# EAGLE board iRob_Upsized_F3DISCO_Shield v26 (EAGLE 9.7.0)
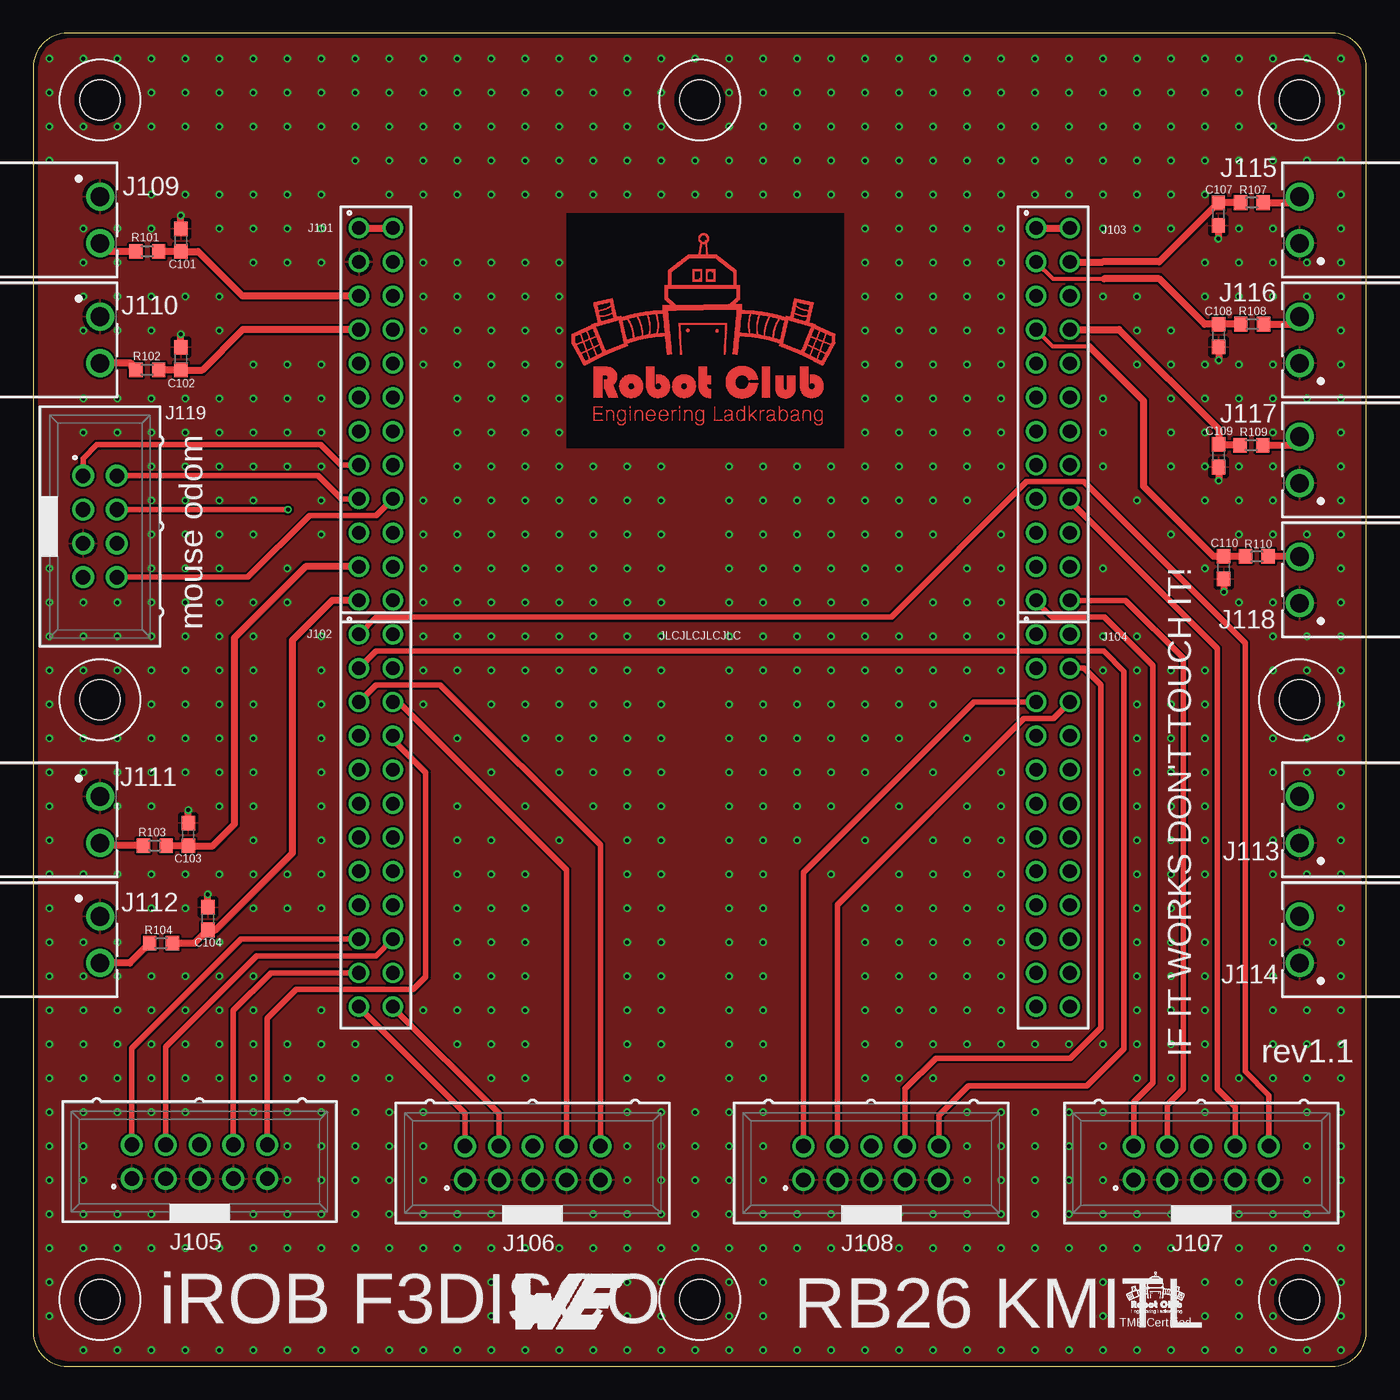
[diagram p0: board, top side]
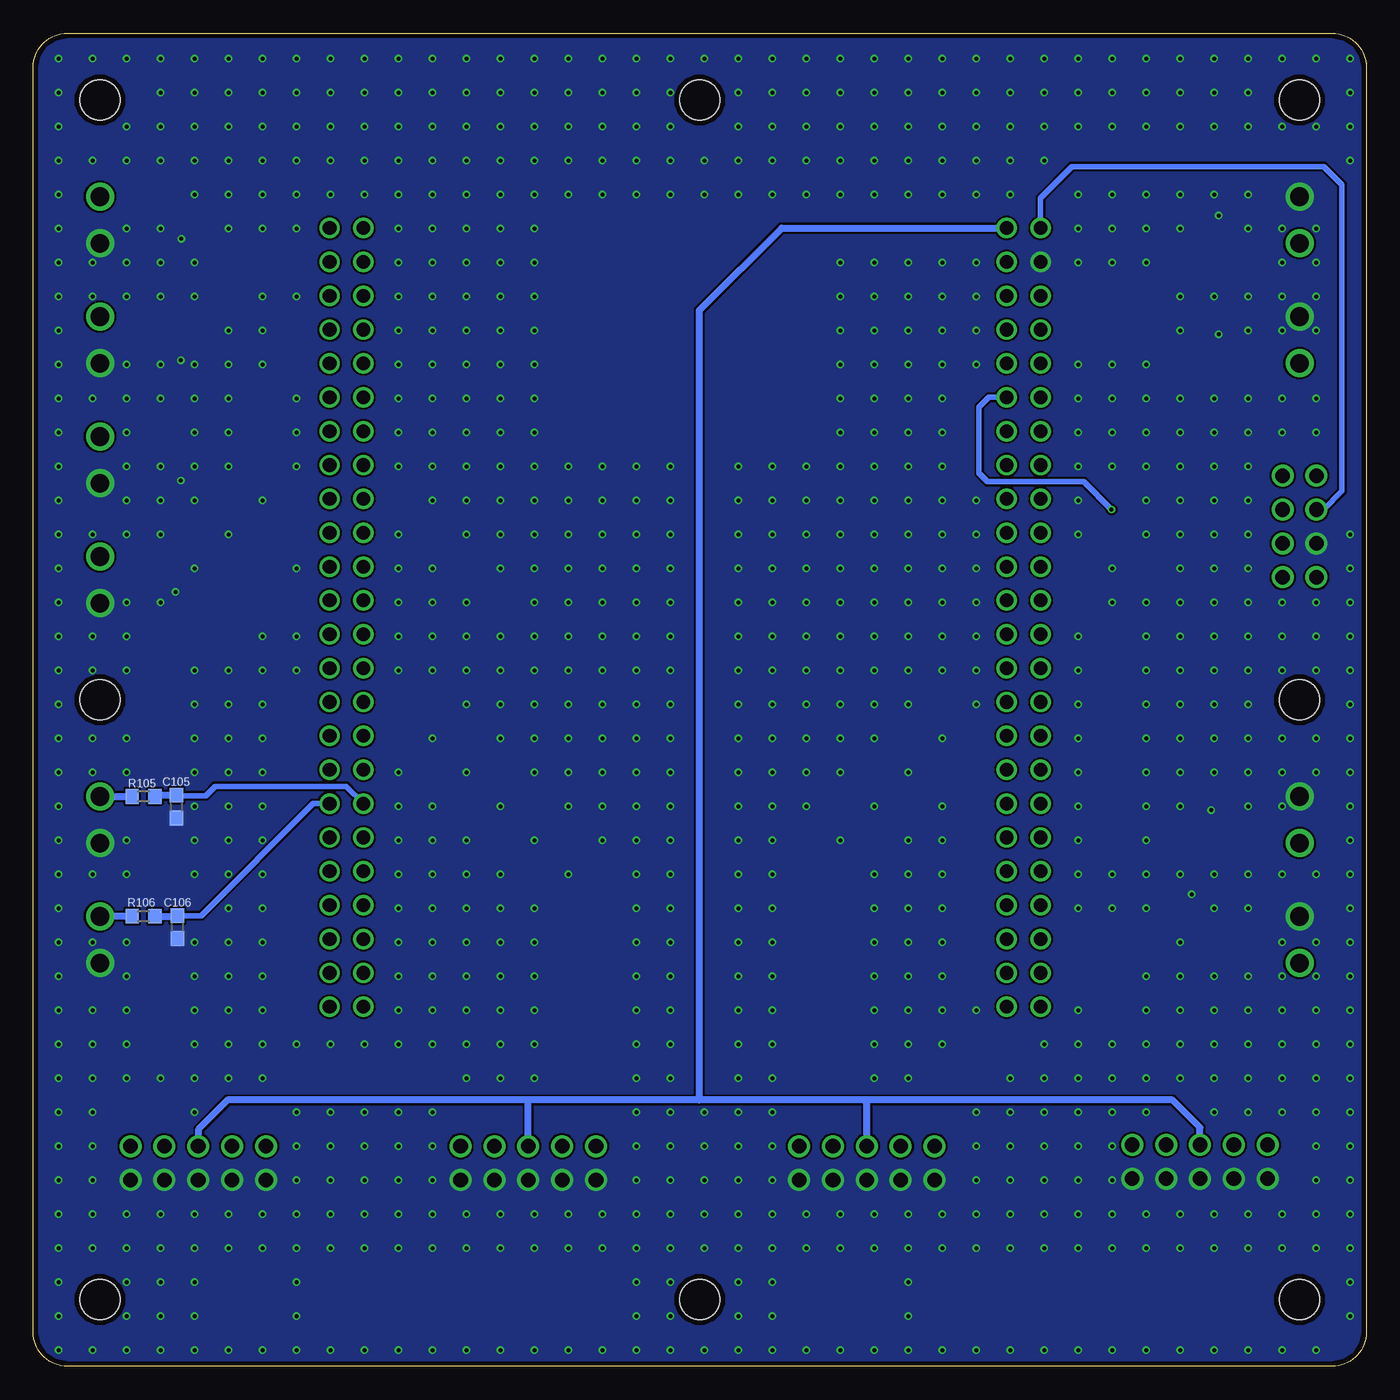
[diagram p1: board, bottom side, seen from below]

Size 100 x 100 mm. Coordinates in mm from the lower left corner, seen from the top.
Outline: 0,97.46 0,2.54 arc90 2.54,0 97.46,0 arc90 100,2.54 100,97.46 arc90 97.46,100 2.54,100 arc90 0,97.46
Copper layers (1*16): Top / Bottom
Stack-up Default Layer Stack: Top User Defined 0.035559375mm / Dielectric-1 User Defined 1.6mm / Bottom User Defined 0.035559375mm
Design rules: minimum copper width 6mil, minimum drill size 10mil, copper clearance wire_polygon to wire_polygon 6mil, copper clearance wire_polygon to pad_smd 6mil, copper clearance wire_polygon to via 6mil, copper clearance pad_smd to pad_smd 6mil, copper clearance pad_smd to via 6mil, copper clearance via to via 6mil, copper clearance smd to pad (same net) 6mil, copper clearance smd to via (same net) 6mil, copper clearance smd to smd (same net) 6mil, dimension clearance 15mil, via restrict clearance 0mil, restrict clearance 0mil, drill distance 6mil, keepout clearance 0mil
Holes 3 mm at 5,95 5,5 95,5 95,95 50,95 50,5 5,50 95,50
RestrictTop: area 40,68.9 to 60.8,86.5
RestrictVias: area 0.8,64.4 to 1.7,65.6; area 18.6,26.1 to 19.6,27.2; area 87.5,62 to 88.2,62.9; area 85.1,64.7 to 85.6,65.2; area 40,69 to 60.9,86.5; area 81,2.7 to 86.9,7.1; area 55.9,2.5 to 77.5,7.3; area 8.7,2.7 to 32.7,7.5; area 35.9,2.2 to 43.9,7.5

## Footprints (pad centres in the part's own frame; a part is rotated, then mirrored left to right if it is on the bottom)
C0603 = smd 1.1 x 1: 1 -0.85,0; 2 0.85,0
61302421821 = drill 1.02: 1 -13.97,-1.27; 2 -13.97,1.27; 3 -11.43,-1.27; 4 -11.43,1.27; 5 -8.89,-1.27; 6 -8.89,1.27; 7 -6.35,-1.27; 8 -6.35,1.27; 9 -3.81,-1.27; 10 -3.81,1.27; 11 -1.27,-1.27; 12 -1.27,1.27; 13 1.27,-1.27; 14 1.27,1.27; 15 3.81,-1.27; 16 3.81,1.27; 17 6.35,-1.27; 18 6.35,1.27; 19 8.89,-1.27; 20 8.89,1.27; 21 11.43,-1.27; 22 11.43,1.27; 23 13.97,-1.27; 24 13.97,1.27
61201021621 = drill 1.1: 1 -5.08,-1.27; 2 -5.08,1.27; 3 -2.54,-1.27; 4 -2.54,1.27; 5 0,-1.27; 6 0,1.27; 7 2.54,-1.27; 8 2.54,1.27; 9 5.08,-1.27; 10 5.08,1.27
691322110002 = drill 1.4: 1 -1.75,0; 2 1.75,0
61200821621 = drill 1.1: 1 -3.81,-1.27; 2 -3.81,1.27; 3 -1.27,-1.27; 4 -1.27,1.27; 5 1.27,-1.27; 6 1.27,1.27; 7 3.81,-1.27; 8 3.81,1.27
R0603 = smd 1 x 1.1: 1 -0.85,0; 2 0.85,0

## Placement (x,y rotation side)
C101  [C0603]  11.07,84.48 90 top
C102  [C0603]  11.07,75.59 90 top
C103  [C0603]  11.63,39.89 90 top
C104  [C0603]  13.1,33.58 90 top
C105  [C0603]  89.27,41.98 270 bottom
C106  [C0603]  89.19,32.95 270 bottom
C107  [C0603]  88.9,86.44 270 top
C108  [C0603]  88.93,77.32 270 top
C109  [C0603]  88.93,68.3 270 top
C110  [C0603]  89.31,59.92 270 top
J101  61302421821  [61302421821]  25.7,71.42 270 top
J102  61302421821  [61302421821]  25.7,40.94 270 top
J103  61302421821  [61302421821]  76.5,71.42 270 top
J104  61302421821  [61302421821]  76.5,40.94 270 top
J105  61201021621  [61201021621]  12.47,15.34 0 top
J106  61201021621  [61201021621]  37.47,15.24 0 top
J107  61201021621  [61201021621]  87.63,15.24 0 top
J108  61201021621  [61201021621]  62.87,15.24 0 top
J109  691322110002  [691322110002]  5,86 270 top
J110  691322110002  [691322110002]  5,77 270 top
J111  691322110002  [691322110002]  5,41 270 top
J112  691322110002  [691322110002]  5,32 270 top
J113  691322110002  [691322110002]  95,41 90 top
J114  691322110002  [691322110002]  95,32 90 top
J115  691322110002  [691322110002]  95,86 90 top
J116  691322110002  [691322110002]  95,77 90 top
J117  691322110002  [691322110002]  95,68 90 top
J118  691322110002  [691322110002]  95,59 90 top
J119  61200821621  [61200821621]  5,63 270 top
R101  [R0603]  8.56,83.64 0 top
R102  [R0603]  8.56,74.75 0 top
R103  [R0603]  9.12,39.05 0 top
R104  [R0603]  9.59,31.74 0 top
R105  [R0603]  91.73,42.75 0 bottom
R106  [R0603]  91.73,33.76 180 bottom
R107  [R0603]  91.41,87.3 0 top
R108  [R0603]  91.44,78.18 0 top
R109  [R0603]  91.39,69.09 0 top
R110  [R0603]  91.8,60.76 0 top

## Library data of the parts
C101-C110 R101-R110 = adafruit
J101-J104 = Wurth_Connectors_WR-PHD; DATASHEET-URL: https://www.we-online.com/catalog/datasheet/61302421821.pdf; GENDER: Socket Header; IR: 3A; MOUNT: THT; PACKAGING: Tray; PART-NUMBER: 61302421821; PINS: 24; PITCH: 2.54mm; ROWS: Dual; TYPE: Straight
J105-J108 = Wurth_Connectors_WR-BHD; CONTACT-RESISTANCE: 20mOhm; DATASHEET-URL: https://www.we-online.com/catalog/datasheet/61201021621.pdf; GENDER: Male; IR: 3A; LENGTH: 20.36mm; MOUNT: THT; PACKAGING: Tray; PART-NUMBER: 61201021621; PINS: 10; PITCH: 2.54mm; TYPE: Straight; WORKING-VOLTAGE: 250V(AC)
J109-J118 = Wurth_Connectors_WR-TBL Pluggable Connector; DATASHEET-URL: https://www.we-online.com/catalog/datasheet/691322110002.pdf; IR-UL: 10A; IR-VDE: 10.5A; MOUNT: THT; PART-NUMBER: 691322110002; PINS: 2; PITCH: 3.5mm; TYPE: Horizontal; WORKING-VOLTAGE-UL: 300V (AC); WORKING-VOLTAGE-VDE: 300V (AC)
J119 = Wurth_Connectors_WR-BHD; CONTACT-RESISTANCE: 20mOhm; DATASHEET-URL: https://www.we-online.com/catalog/datasheet/61200821621.pdf; GENDER: Male; IR: 3A; LENGTH: 17.82mm; MOUNT: THT; PACKAGING: Tray; PART-NUMBER: 61200821621; PINS: 8; PITCH: 2.54mm; TYPE: Straight; WORKING-VOLTAGE: 250V(AC)

## Nets
BOOT0: J103.19
DRDY: J103.13
DRDY/INT2_L3GD20: J103.16
ENC1_A: J103.23 J107.2
ENC1_B: J103.24 J107.4
ENC2_A: J104.5 J108.2
ENC2_B: J104.6 J108.4
ENC3_A: J102.23 J106.2
ENC3_B: J102.24 J106.4
ENC4_A: J102.20 J105.4
ENC4_B: J102.19 J105.2
GND: C101.2 C102.2 C103.2 C104.2 C105.2 C106.2 C107.2 C108.2 C109.2 C110.2 J101.3 J105.1 J105.3 J105.5 J105.7 J105.9 J106.1 J106.3 J106.5 J106.7 J106.9 J107.1 J107.3 J107.5 J107.7 J107.9 J108.1 J108.3 J108.5 J108.7 J108.9 J109.1 J110.1 J111.1 J112.1 J113.1 J114.1 J115.1 J116.1 J117.1 J118.1 J119.5
I2C_SCL: J103.21
I2C_SDA: J103.22
INT1: J103.11
INT1_L3GD20: J103.15
INT2: J103.12
LED_K: J119.7
M1_INB: J103.18 J107.8
M1_PWM: J102.1 J107.10
M2_INB: J104.4 J108.8
M2_PWM: J102.3 J108.10
M3_INB: J102.6 J106.8
M3_PWM: J102.5 J106.10
M4_INB: J102.21 J105.8
M4_PWM: J102.8 J105.10
N$1: J109.2 R101.1
N$4: J110.2 R102.1
N$7: J111.2 R103.1
N$8: J119.6
N$10: J112.2 R104.1
N$13: J113.2 R105.1
N$16: J114.2 R106.2
N$19: J115.2 R107.2
N$21: J116.2 R108.2
N$23: J117.2 R109.2
N$25: J118.2 R110.2
NRST: J101.4
OSC_IN: J103.5
OSC_OUT: J103.6
PB1: C103.1 J101.21 R103.2
PC1: C101.1 J101.5 R101.2
PC3: C102.1 J101.7 R102.2
PC10: C105.1 J104.11 R105.2
PC11: C106.1 J104.12 R106.1
PC14: C110.1 J103.7 R110.1
PC15: C109.1 J103.8 R109.1
PE7: C104.1 J101.23 R104.2
PF9: C108.1 J103.3 R108.1
PF10: C107.1 J103.4 R107.1
ROS_UART_RX: J101.19
ROS_UART_TX: J101.20
SPI1_MISO: J101.18 J119.8
SPI1_MOSI: J101.17 J119.2
SPI1_SCK: J101.15 J119.1
SPI_CS_ADNS5090: J101.12 J119.4
SPI_CS_L3GD20: J103.14
SWCLK: J104.13
SWDIO: J104.16
SWO: J104.2
USB_N: J104.18
USB_P: J104.17
VDD: J103.20
VREG_3V3: J101.1 J101.2 J105.6 J106.6 J107.6 J108.6 J119.3
VUSB_5V: J103.1 J103.2

## Tracks (layer width: path | path; a pad name or v marks a point on that pad's centre or on a via)
ENC1_A
  Top 0.406: J107.2 82.55,19.84 83.98,21.27 83.98,52.58 80.37,56.2 76.4,56.2 75.23,57.37 J103.23
ENC1_B
  Top 0.406: J107.4 85.09,19.61 86.28,20.8 86.28,53.12 81.94,57.45 J103.24
ENC2_A
  Top 0.406: J108.2 57.78,37.03 70.58,49.83 J104.5
ENC2_B
  Top 0.406: J108.4 60.33,34.6 74.3,48.58 76.52,48.58 J104.6
ENC3_A
  Top 0.406: J102.23 24.43,26.93 32.38,18.97 J106.2
ENC3_B
  Top 0.406: J102.24 26.97,26.93 34.92,18.97 J106.4
ENC4_A
  Top 0.406: J102.20 25.72,30.8 16.76,30.8 9.93,23.96 J105.4
ENC4_B
  Top 0.406: J102.19 15.6,32.05 7.39,23.84 J105.2
GND  (via drill 0.3)
  Top 0.508: C101.2 v11.07,86.33 | C102.2 v11.07,77.42 | C103.2 v11.63,41.72 | C104.2 v13.1,35.41 | C107.2 v88.9,84.58 | C110.2 89.33,59.04 v89.33,58.09 | C109.2 v88.92,66.45 | C108.2 v88.92,75.46
  other vias: 67.5,98.1 26.7,98.1 72.6,95.55 31.8,95.55 98.1,93 57.3,93 16.5,93 62.4,90.45 87.9,87.9 47.1,87.9 93,85.35 36.9,82.8 82.8,80.25 67.5,77.7 72.6,75.15 31.8,75.15 98.1,72.6 16.5,72.6 62.4,70.05 21.6,70.05 87.9,67.5 47.1,67.5 98.1,31.8 62.4,29.25 87.9,26.7 47.1,26.7 6.3,26.7 93,24.15 52.2,24.15 11.4,24.15 36.9,21.6 1.2,19.05 26.7,16.5 72.6,13.95 98.1,11.4 57.3,11.4 16.5,11.4 62.4,8.85 21.6,8.85 87.9,6.3 47.1,6.3 93,3.75 36.9,1.2 77.7,1.2 52.2,3.75 31.8,34.35 72.6,34.35 67.5,36.9 1.2,39.45 82.8,39.45 36.9,42 11.4,44.55 52.2,44.55 93,44.55 6.3,47.1 47.1,47.1 87.9,47.1 21.6,49.65 62.4,49.65 16.5,52.2 57.3,52.2 98.1,52.2 31.8,54.75 72.6,54.75 67.5,57.3 1.2,59.85 42,59.85 36.9,62.4 11.4,64.95 52.2,64.95 93,64.95 87.9,98.1 47.1,98.1 6.3,98.1 52.2,95.55 11.4,95.55 77.7,93 36.9,93 82.8,90.45 42,90.45 1.2,90.45 67.5,87.9 26.7,87.9 72.6,85.35 98.1,82.8 16.5,82.8 62.4,80.25 6.3,77.7 93,75.15 36.9,72.6 67.5,67.5 11.4,34.35 36.9,31.8 82.8,29.25 1.2,29.25 67.5,26.7 72.6,24.15 31.8,24.15 98.1,21.6 16.5,21.6 21.6,19.05 47.1,16.5 52.2,13.95 77.7,11.4 36.9,11.4 82.8,8.85 42,8.85 1.2,8.85 16.5,1.2 57.3,1.2 98.1,1.2 52.2,34.35 6.3,36.9 47.1,36.9 87.9,36.9 21.6,39.45 62.4,39.45 16.5,42 57.3,42 98.1,42 72.6,44.55 1.2,49.65 42,49.65 82.8,49.65 36.9,52.2 11.4,54.75 52.2,54.75 93,54.75 6.3,57.3 47.1,57.3 62.4,59.85 16.5,62.4 57.3,62.4 98.1,62.4 31.8,64.95 77.7,98.1 36.9,98.1 82.8,95.55 42,95.55 1.2,95.55 87.9,93 47.1,93 6.3,93 93,90.45 52.2,90.45 98.1,87.9 57.3,87.9 16.5,87.9 62.4,85.35 21.6,85.35 67.5,82.8 72.6,80.25 31.8,80.25 36.9,77.7 82.8,75.15 87.9,72.6 6.3,72.6 93,70.05 11.4,70.05 98.1,67.5 57.3,67.5 1.2,34.35 87.9,31.8 47.1,31.8 6.3,31.8 93,29.25 52.2,29.25 11.4,29.25 98.1,26.7 16.5,26.7 62.4,24.15 21.6,24.15 67.5,21.6 26.7,21.6 72.6,19.05 77.7,16.5 1.2,13.95 87.9,11.4 47.1,11.4 6.3,11.4 93,8.85 52.2,8.85 11.4,8.85 98.1,6.3 26.7,1.2 67.5,1.2 82.8,34.35 36.9,36.9 31.8,39.45 72.6,39.45 21.6,44.55 62.4,44.55 16.5,47.1 57.3,47.1 98.1,47.1 11.4,49.65 52.2,49.65 6.3,52.2 47.1,52.2 87.9,52.2 1.2,54.75 42,54.75 82.8,54.75 36.9,57.3 31.8,59.85 72.6,59.85 67.5,62.4 21.6,64.95 62.4,64.95 16.5,67.5 98.1,98.1 57.3,98.1 16.5,98.1 62.4,95.55 21.6,95.55 67.5,93 26.7,93 72.6,90.45 31.8,90.45 77.7,87.9 36.9,87.9 82.8,85.35 87.9,82.8 6.3,82.8 93,80.25 11.4,80.25 98.1,77.7 62.4,75.15 21.6,75.15 67.5,72.6 72.6,70.05 31.8,70.05 36.9,67.5 67.5,31.8 72.6,29.25 31.8,29.25 36.9,26.7 82.8,24.15 1.2,24.15 87.9,21.6 47.1,21.6 6.3,21.6 52.2,19.05 11.4,19.05 98.1,16.5 21.6,13.95 67.5,11.4 26.7,11.4 72.6,8.85 31.8,8.85 6.3,1.2 47.1,1.2 87.9,1.2 1.2,3.75 21.6,34.35 62.4,34.35 16.5,36.9 98.1,36.9 52.2,39.45 93,39.45 6.3,42 47.1,42 87.9,42 1.2,44.55 42,44.55 82.8,44.55 36.9,47.1 67.5,52.2 21.6,54.75 62.4,54.75 16.5,57.3 57.3,57.3 98.1,57.3 11.4,59.85 52.2,59.85 47.1,62.4 42,64.95 82.8,64.95 85.35,98.1 44.55,98.1 3.75,98.1 90.45,95.55 8.85,95.55 75.15,93 34.35,93 80.25,90.45 39.45,90.45 64.95,87.9 70.05,85.35 95.55,82.8 85.35,77.7 3.75,77.7 90.45,75.15 34.35,72.6 80.25,70.05 39.45,70.05 64.95,67.5 8.85,34.35 34.35,31.8 64.95,26.7 70.05,24.15 95.55,21.6 54.75,21.6 13.95,21.6 19.05,19.05 44.55,16.5 3.75,16.5 49.65,13.95 75.15,11.4 34.35,11.4 80.25,8.85 39.45,8.85 13.95,1.2 54.75,1.2 95.55,1.2 3.75,36.9 44.55,36.9 85.35,36.9 13.95,42 54.75,42 64.95,47.1 39.45,49.65 34.35,52.2 8.85,54.75 3.75,57.3 44.55,57.3 19.05,59.85 59.85,59.85 13.95,62.4 54.75,62.4 95.55,62.4 29.25,64.95 70.05,64.95 64.95,98.1 24.15,98.1 70.05,95.55 29.25,95.55 54.75,93 13.95,93 59.85,90.45 85.35,87.9 44.55,87.9 90.45,85.35 8.85,85.35 34.35,82.8 80.25,80.25 39.45,80.25 64.95,77.7 70.05,75.15 29.25,75.15 95.55,72.6 13.95,72.6 19.05,70.05 85.35,67.5 44.55,67.5 95.55,31.8 54.75,31.8 13.95,31.8 85.35,26.7 44.55,26.7 3.75,26.7 8.85,24.15 34.35,21.6 80.25,19.05 24.15,16.5 70.05,13.95 29.25,13.95 95.55,11.4 54.75,11.4 13.95,11.4 59.85,8.85 19.05,8.85 44.55,6.3 90.45,3.75 34.35,1.2 75.15,1.2 70.05,34.35 64.95,36.9 39.45,39.45 8.85,44.55 3.75,47.1 44.55,47.1 85.35,47.1 59.85,49.65 13.95,52.2 54.75,52.2 95.55,52.2 29.25,54.75 70.05,54.75 39.45,59.85 80.25,59.85 34.35,62.4 8.85,64.95 90.45,64.95 75.15,98.1 34.35,98.1 80.25,95.55 39.45,95.55 85.35,93 44.55,93 3.75,93 90.45,90.45 49.65,90.45 54.75,87.9 13.95,87.9 19.05,85.35 64.95,82.8 70.05,80.25 29.25,80.25 34.35,77.7 39.45,75.15 85.35,72.6 3.75,72.6 8.85,70.05 54.75,67.5 85.35,31.8 44.55,31.8 3.75,31.8 8.85,29.25 95.55,26.7 54.75,26.7 13.95,26.7 19.05,24.15 64.95,21.6 24.15,21.6 70.05,19.05 29.25,19.05 75.15,16.5 80.25,13.95 85.35,11.4 44.55,11.4 3.75,11.4 90.45,8.85 49.65,8.85 8.85,8.85 54.75,6.3 24.15,1.2 64.95,1.2 34.35,36.9 70.05,39.45 64.95,42 59.85,44.55 13.95,47.1 54.75,47.1 95.55,47.1 8.85,49.65 3.75,52.2 44.55,52.2 85.35,52.2 39.45,54.75 80.25,54.75 34.35,57.3 29.25,59.85 70.05,59.85 64.95,62.4 59.85,64.95 13.95,67.5 95.55,98.1 54.75,98.1 13.95,98.1 59.85,95.55 19.05,95.55 64.95,93 24.15,93 70.05,90.45 29.25,90.45 75.15,87.9 34.35,87.9 80.25,85.35 3.75,82.8 90.45,80.25 8.85,80.25 13.95,77.7 19.05,75.15 64.95,72.6 70.05,70.05 34.35,67.5 64.95,31.8 70.05,29.25 34.35,26.7 80.25,24.15 85.35,21.6 44.55,21.6 3.75,21.6 49.65,19.05 8.85,19.05 95.55,16.5 54.75,16.5 19.05,13.95 64.95,11.4 24.15,11.4 70.05,8.85 29.25,8.85 34.35,6.3 80.25,3.75 3.75,1.2 44.55,1.2 85.35,1.2 19.05,34.35 13.95,36.9 54.75,36.9 95.55,36.9 44.55,42 85.35,42 39.45,44.55 29.25,49.65 64.95,52.2 59.85,54.75 13.95,57.3 54.75,57.3 8.85,59.85 44.55,62.4 85.35,62.4 39.45,64.95 72.6,98.1 31.8,98.1 67.5,95.55 26.7,95.55 62.4,93 21.6,93 98.1,90.45 57.3,90.45 52.2,87.9 11.4,87.9 6.3,85.35 36.9,80.25 72.6,77.7 31.8,77.7 67.5,75.15 62.4,72.6 21.6,72.6 98.1,70.05 16.5,70.05 93,67.5 52.2,67.5 62.4,31.8 98.1,29.25 16.5,29.25 93,26.7 52.2,26.7 11.4,26.7 87.9,24.15 47.1,24.15 6.3,24.15 82.8,21.6 1.2,21.6 77.7,19.05 72.6,16.5 26.7,13.95 62.4,11.4 21.6,11.4 98.1,8.85 57.3,8.85 16.5,8.85 93,6.3 52.2,6.3 87.9,3.75 42,1.2 82.8,1.2 47.1,3.75 67.5,34.35 31.8,36.9 72.6,36.9 1.2,42 42,42 82.8,42 6.3,44.55 47.1,44.55 87.9,44.55 11.4,47.1 52.2,47.1 93,47.1 16.5,49.65 57.3,49.65 98.1,49.65 21.6,52.2 62.4,52.2 67.5,54.75 31.8,57.3 72.6,57.3 36.9,59.85 1.2,62.4 42,62.4 47.1,64.95 87.9,64.95 11.4,67.5 93,98.1 52.2,98.1 11.4,98.1 87.9,95.55 47.1,95.55 82.8,93 42,93 1.2,93 77.7,90.45 36.9,90.45 72.6,87.9 31.8,87.9 67.5,85.35 62.4,82.8 21.6,82.8 98.1,80.25 87.9,75.15 36.9,70.05 72.6,67.5 31.8,67.5 82.8,31.8 1.2,31.8 36.9,29.25 72.6,26.7 31.8,26.7 67.5,24.15 62.4,21.6 21.6,21.6 98.1,19.05 16.5,19.05 52.2,16.5 47.1,13.95 82.8,11.4 42,11.4 1.2,11.4 77.7,8.85 36.9,8.85 21.6,1.2 62.4,1.2 47.1,34.35 11.4,36.9 52.2,36.9 93,36.9 16.5,39.45 57.3,39.45 98.1,39.45 21.6,42 67.5,44.55 31.8,47.1 36.9,49.65 1.2,52.2 42,52.2 82.8,52.2 6.3,54.75 47.1,54.75 11.4,57.3 52.2,57.3 93,57.3 57.3,59.85 98.1,59.85 21.6,62.4 62.4,62.4 67.5,64.95 82.8,98.1 42,98.1 1.2,98.1 77.7,95.55 36.9,95.55 93,93 52.2,93 11.4,93 87.9,90.45 47.1,90.45 62.4,87.9 21.6,87.9 98.1,85.35 16.5,85.35 72.6,82.8 31.8,82.8 67.5,80.25 82.8,77.7 36.9,75.15 93,72.6 11.4,72.6 87.9,70.05 6.3,70.05 62.4,67.5 93,31.8 52.2,31.8 87.9,29.25 47.1,29.25 6.3,29.25 62.4,26.7 21.6,26.7 98.1,24.15 16.5,24.15 26.7,19.05 1.2,16.5 77.7,13.95 93,11.4 52.2,11.4 11.4,11.4 87.9,8.85 47.1,8.85 6.3,8.85 98.1,3.75 31.8,1.2 72.6,1.2 36.9,34.35 1.2,36.9 82.8,36.9 67.5,39.45 31.8,42 72.6,42 16.5,44.55 57.3,44.55 98.1,44.55 21.6,47.1 62.4,47.1 47.1,49.65 87.9,49.65 11.4,52.2 52.2,52.2 93,52.2 36.9,54.75 1.2,57.3 42,57.3 31.8,62.4 72.6,62.4 16.5,64.95 57.3,64.95 98.1,64.95 21.6,67.5 62.4,98.1 21.6,98.1 98.1,95.55 57.3,95.55 16.5,95.55 72.6,93 31.8,93 67.5,90.45 26.7,90.45 82.8,87.9 42,87.9 93,82.8 87.9,80.25 6.3,80.25 62.4,77.7 98.1,75.15 16.5,75.15 72.6,72.6 31.8,72.6 67.5,70.05 42,67.5 72.6,31.8 31.8,31.8 67.5,29.25 82.8,26.7 1.2,26.7 77.7,24.15 36.9,24.15 93,21.6 52.2,21.6 11.4,21.6 87.9,19.05 47.1,19.05 6.3,19.05 21.6,16.5 98.1,13.95 72.6,11.4 31.8,11.4 67.5,8.85 26.7,8.85 1.2,6.3 11.4,1.2 52.2,1.2 93,1.2 16.5,34.35 98.1,34.35 21.6,36.9 47.1,39.45 87.9,39.45 52.2,42 1.2,47.1 42,47.1 82.8,47.1 67.5,49.65 31.8,52.2 72.6,52.2 16.5,54.75 57.3,54.75 98.1,54.75 62.4,57.3 47.1,59.85 87.9,59.85 11.4,62.4 52.2,62.4 93,62.4 36.9,64.95 70.05,98.1 29.25,98.1 64.95,95.55 24.15,95.55 59.85,93 19.05,93 95.55,90.45 54.75,90.45 49.65,87.9 8.85,87.9 85.35,85.35 3.75,85.35 39.45,82.8 34.35,80.25 70.05,77.7 29.25,77.7 64.95,75.15 19.05,72.6 13.95,70.05 90.45,67.5 54.75,29.25 13.95,29.25 8.85,26.7 85.35,24.15 44.55,24.15 3.75,24.15 75.15,19.05 70.05,16.5 29.25,16.5 24.15,13.95 59.85,11.4 19.05,11.4 95.55,8.85 54.75,8.85 13.95,8.85 90.45,6.3 39.45,1.2 80.25,1.2 44.55,3.75 64.95,34.35 70.05,36.9 34.35,39.45 3.75,44.55 44.55,44.55 85.35,44.55 8.85,47.1 13.95,49.65 54.75,49.65 59.85,52.2 64.95,54.75 29.25,57.3 70.05,57.3 34.35,59.85 39.45,62.4 44.55,64.95 8.85,67.5 90.45,98.1 49.65,98.1 8.85,98.1 85.35,95.55 44.55,95.55 80.25,93 39.45,93 75.15,90.45 34.35,90.45 70.05,87.9 29.25,87.9 64.95,85.35 19.05,82.8 95.55,80.25 13.95,80.25 8.85,77.7 85.35,75.15 80.25,72.6 39.45,72.6 34.35,70.05 70.05,67.5 34.35,29.25 70.05,26.7 29.25,26.7 64.95,24.15 24.15,24.15 19.05,21.6 95.55,19.05 54.75,19.05 49.65,16.5 44.55,13.95 3.75,13.95 80.25,11.4 39.45,11.4 75.15,8.85 34.35,8.85 19.05,1.2 59.85,1.2 44.55,34.35 85.35,34.35 8.85,36.9 54.75,39.45 59.85,42 70.05,47.1 34.35,49.65 39.45,52.2 80.25,52.2 3.75,54.75 44.55,54.75 8.85,57.3 90.45,57.3 13.95,59.85 54.75,59.85 59.85,62.4 64.95,64.95 80.25,98.1 39.45,98.1 75.15,95.55 34.35,95.55 90.45,93 8.85,93 85.35,90.45 44.55,90.45 59.85,87.9 19.05,87.9 13.95,85.35 70.05,82.8 29.25,82.8 64.95,80.25 39.45,77.7 34.35,75.15 90.45,72.6 8.85,72.6 85.35,70.05 3.75,70.05 59.85,67.5 85.35,29.25 44.55,29.25 3.75,29.25 95.55,24.15 54.75,24.15 13.95,24.15 24.15,19.05 80.25,16.5 75.15,13.95 90.45,11.4 49.65,11.4 8.85,11.4 85.35,8.85 44.55,8.85 3.75,8.85 29.25,1.2 70.05,1.2 54.75,3.75 34.35,34.35 70.05,42 13.95,44.55 54.75,44.55 95.55,44.55 59.85,47.1 44.55,49.65 85.35,49.65 8.85,52.2 34.35,54.75 39.45,57.3 64.95,59.85 29.25,62.4 13.95,64.95 54.75,64.95 19.05,67.5 59.85,98.1 19.05,98.1 54.75,95.55 13.95,95.55 70.05,93 29.25,93 64.95,90.45 24.15,90.45 80.25,87.9 39.45,87.9 90.45,82.8 3.75,80.25 70.05,72.6 64.95,70.05 80.25,67.5 39.45,67.5 70.05,31.8 64.95,29.25 75.15,24.15 34.35,24.15 90.45,21.6 8.85,21.6 44.55,19.05 3.75,19.05 19.05,16.5 95.55,13.95 54.75,13.95 70.05,11.4 29.25,11.4 64.95,8.85 24.15,8.85 80.25,6.3 8.85,1.2 49.65,1.2 90.45,1.2 34.35,3.75 54.75,34.35 19.05,36.9 59.85,36.9 44.55,39.45 85.35,39.45 8.85,42 34.35,44.55 39.45,47.1 64.95,49.65 29.25,52.2 70.05,52.2 13.95,54.75 54.75,54.75 95.55,54.75 19.05,57.3 59.85,57.3 44.55,59.85 8.85,62.4 90.45,62.4 34.35,64.95
  pour Bottom (rank 6, no thermals): 2.54,100 97.46,100 arc-90 100,97.46 100,2.54 arc-90 97.46,0 2.54,0 arc-90 0,2.54 0,97.46 arc-90
  pour Top (rank 6): 0,100 100,100 100,0 0,0
M1_INB
  Top 0.406: J107.8 90.17,19.45 88.82,20.8 88.82,53.85 77.77,64.9 J103.18
M1_PWM
  Top 0.406: J102.1 25.72,56.2 64.36,56.2 74.52,66.36 78.83,66.36 90.93,54.27 90.93,22.1 92.71,20.32 J107.10
M2_INB
  Top 0.406: J104.4 78.82,52.37 80.09,51.1 80.09,25.4 77.79,23.1 67.71,23.1 65.41,20.8 J108.8
M2_PWM
  Top 0.406: J102.3 25.72,53.66 80.3,53.66 81.84,52.12 81.84,23.81 79.06,21.03 70.17,21.03 67.94,18.81 J108.10
M3_INB
  Top 0.406: J102.6 27.41,49.83 40.01,37.24 J106.8
M3_PWM
  Top 0.406: J102.5 25.7,51.1 25.7,51.12 30.52,51.12 42.55,39.1 J106.10
M4_INB
  Top 0.406: J102.21 17.84,29.51 15.01,26.68 J105.8
M4_PWM
  Top 0.406: J102.8 26.97,47.01 29.45,44.53 29.45,29.21 28.49,28.26 19.7,28.26 17.55,26.11 J105.10
N$1
  Top 0.508: J109.2 5.52,83.64 R101.1
N$4
  Top 0.508: R102.1 7.44,74.75 7.35,75.25 J110.2
N$7
  Top 0.508: R103.1 5.2,39.05 J111.2
N$10
  Top 0.508: R104.1 7.24,30.25 J112.2
N$13
  Bottom 0.508: J113.2 | J113.2 R105.1
N$16
  Bottom 0.508: R106.2 94.99,33.76 J114.2
N$19
  Top 0.508: R107.2 94.48,87.3 J115.2
N$21
  Top 0.508: R108.2 94.47,78.18 J116.2
N$23
  Top 0.508: R109.2 94.48,69.09 95,69.6 J117.2
N$25
  Top 0.508: J118.2 R110.2
PB1
  Top 0.508: R103.2 11.62,39.05 C103.1 13.47,39.04 15.07,40.64 15.07,54.63 20.43,59.99 J101.21
PC1
  Top 0.508: R101.2 11.06,83.64 C101.1 12.36,83.63 15.67,80.31 J101.5
PC3
  Top 0.508: R102.2 11.06,74.75 C102.1 12.69,74.74 15.72,77.78 J101.7
PC10
  Bottom 0.406: J104.11 76.52,43.5 86.36,43.5 87.07,42.78 89.22,42.78 C105.1
  Bottom 0.508: C105.1 90.8,42.83 R105.2
PC11
  Bottom 0.406: J104.12 79,42.21 87.41,33.8 C106.1
  Bottom 0.508: R106.1 89.23,33.76 C106.1
PC14
  Top 0.305: J103.7 76.47,76.53 79.2,76.53 79.38,76.53
  Top 0.508: R110.1 89.32,60.76 C110.1 88.53,60.77 83.29,66.02 83.29,72.44 79.2,76.53
PC15
  Top 0.508: R109.1 88.99,69.09 C109.1 88.92,70.29 81.45,77.77 J103.8
PE7
  Top 0.508: R104.2 12.11,31.74 C104.1 13.69,32.73 19.43,38.47 19.43,54.45 22.43,57.45 J101.23
PF9
  Top 0.305: J103.3 76.5,81.58 80.34,81.58
  Top 0.508: R108.1 C108.1 87.88,78.17 84.47,81.58 80.34,81.58
PF10
  Top 0.508: R107.1 88.91,87.3 C107.1 84.47,82.86 80.24,82.86 80.23,82.85 J103.4
SPI1_MISO
  Top 0.406: J119.8 16.09,59.19 20.72,63.82 25.72,63.82 J101.18
SPI1_MOSI
  Top 0.406: J101.17 23.12,65.07 21.38,66.81 J119.2
SPI1_SCK
  Top 0.406: J101.15 23.08,67.61 21.55,69.14 4.76,69.14 3.73,68.1 J119.1
SPI_CS_ADNS5090  (via drill 0.3)
  Top 0.406: J119.4 v19.11,64.27
  Bottom 0.406: v19.11,64.27 21.19,66.36 28.42,66.36 29.05,66.99 29.05,71.96 28.32,72.69 J101.12
VREG_3V3
  Top 0.508: J101.1 J101.2
  Bottom 0.406: J119.3 3.2,64.27 1.83,65.64 1.83,88.66 3.17,90.01 22.07,90.01 24.43,87.65 J101.1
  Bottom 0.508: J105.6 12.47,17.91 14.53,19.96 37.69,19.96 | 37.69,19.96 50.04,19.96 | 50.04,19.96 62.92,19.96 | 62.92,19.96 85.42,19.96 87.58,17.8 87.58,16.56 J107.6 | J106.6 37.47,19.74 37.69,19.96 | J108.6 62.87,19.91 62.92,19.96 | J101.2 43.84,85.39 50.04,79.2 50.04,19.96
VUSB_5V
  Top 0.508: J103.1 J103.2
(copper drawn outside any net)
  shapes: Top area x13730

## Text on the board
SilkscreenTop: mouse odom | JLCJLCJLCJLC | IF IT WORKS DON'T TOUCH IT! | rev1.1 | iROB F3DISCO | RB26 KMITL | TMB Certified